# Altium PCB F103RCT6验证板_2022-02-19.pcbdoc (part 1 of 2)
Units mm, origin at the board's own origin, x right, y up, seen from the top; angles counter-clockwise.
Board outline 119 x 89.53 mm, 2 copper layers (Top Layer, Bottom Layer); 128 components, 123 nets, 496 pads, 479 vias.
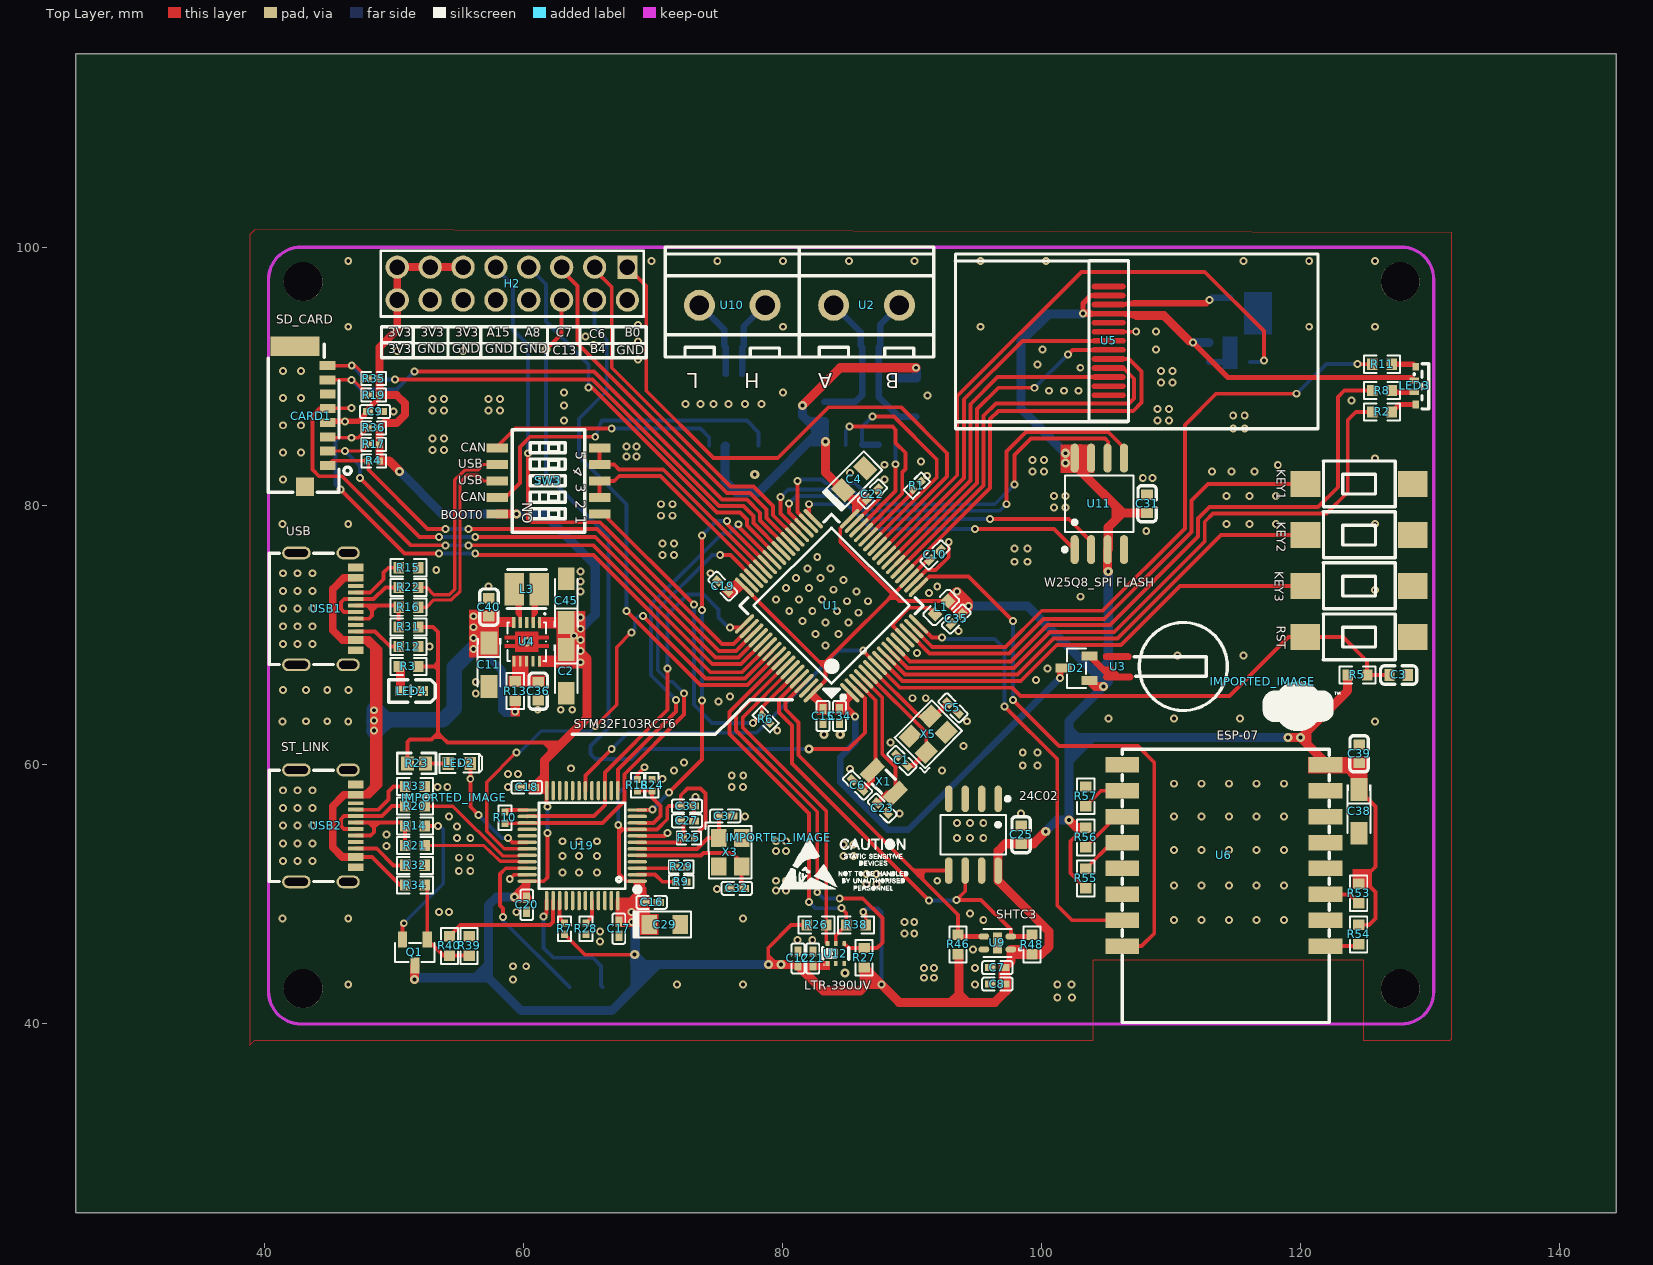
[diagram p0: Top Layer view]
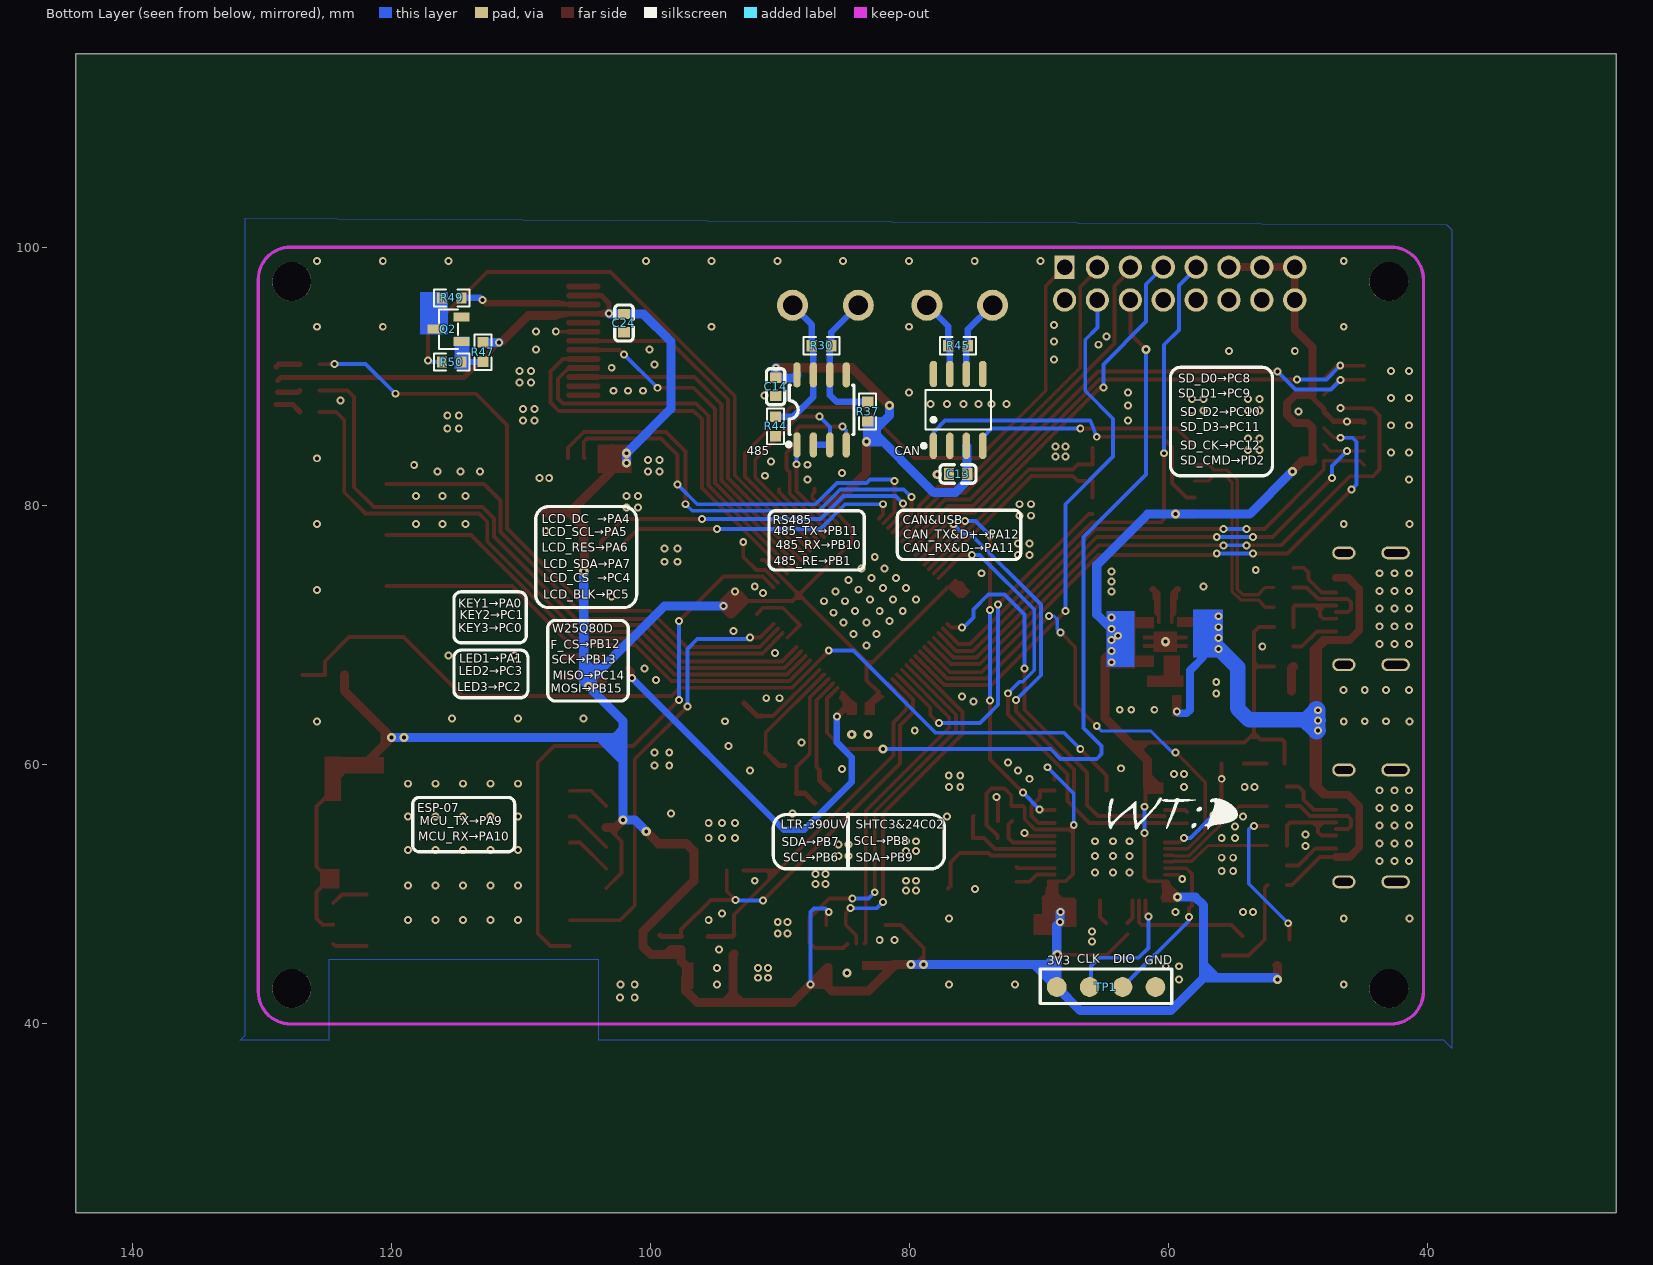
[diagram p1: Bottom Layer view, seen from below]

## Layer stack, top to bottom
Top Layer: signal copper (thickness not stored)
Dielectric: dielectric 0.32, FR-4, Dk 4.8
Bottom Layer: signal copper (thickness not stored)

## Board outline
144.399,25.4 25.4,25.4 25.4,114.935 144.399,114.935

## Components (designator, comment, footprint, x,y, rotation, side; value= is the part's Value field where it differs from the comment)
24C02 "M24C02-WMN6TP" SOIC-8_L4.9-W3.9-P1.27-LS6.0-BL#1 94.743,54.609 r180 top
485 "SP3485EN-L/TR" SOIC-8_L5.0-W4.0-P1.27-LS6.0-BL 86.782,87.422 r0 bottom
C1 "10pF" C0402 89.224,60.343 r315 top
C2 "10uF" CAP-SMD_L3.2-W1.6-R-RD 63.287,67.229 r90 top
C3 "100nF" C0603#1 127.578,66.947 r180 top
C4 "TCA1C106M8R" CAP-SMD_L3.2-W1.6-FD 85.541,82.06 r45 top
C5 "10pF" C0402 93.161,64.407 r135 top
C6 "10pF" C0402 85.795,58.438 r135 top
C7 "100nF" C0402_NEW 96.59,44.341 r0 top
C8 "10uF" C0402 96.59,43.071 r0 top
C9 "100nF" C0402_NEW 48.525,87.295 r180 top
C10 "100nF" C0402_NEW 91.764,76.218 r225 top
C11 "10uF" CAP-SMD_L3.2-W1.6-R-RD 57.318,67.737 r90 top
C12 "100nF" C0402_NEW 81.191,45.047 r270 top
C13 "100nF" C0603#2 76.241,82.469 r0 bottom
C14 "100nF" C0603#2 90.338,89.2 r90 bottom
C15 "100nF" C0402_NEW 83.128,63.772 r90 top
C16 "100nF" C0402_NEW 69.891,49.384 r180 top
C17 "100nF" C0402_NEW 67.351,47.352 r90 top
C18 "100nF" C0402_NEW 60.239,58.274 r0 top
C19 "100nF" C0402_NEW 75.381,73.805 r315 top
C20 "100nF" C0402_NEW 60.239,49.195 r90 top
C21 "4.7uF" C0402 82.334,45.047 r270 top
C22 "100nF" C0402_NEW 86.938,80.917 r225 top
C23 "10pF" C0402 87.7,56.66 r315 top
C24 "1uF" C0603#2 102.051,94.125 r90 bottom
C25 "100nF" C0603#1 98.426,54.609 r90 top
C27 "100nF" C0402_NEW 72.613,55.677 r180 top
C29 "TCA1C106M8R" CAP-SMD_L3.2-W1.6-FD 70.907,47.671 r0 top
C31 "100nF" C0603#1 108.151,80.162 r270 top
C32 "15pF" C0402 76.465,50.465 r0 top
C33 "100nF" C0402_NEW 72.613,56.82 r180 top
C34 "100nF" C0402_NEW 84.398,63.772 r270 top
C35 "100nF" C0402_NEW 93.418,71.271 r45 top
C36 "100nF" C0603#1 61.128,65.705 r90 top
C37 "15pF" C0402 75.576,56.053 r180 top
C38 "10uF" CAP-SMD_L3.2-W1.6-R-RD 124.53,56.406 r90 top
C39 "100nF" C0603#1 124.53,60.851 r270 top
C40 "100nF" C0603#1 57.318,72.182 r270 top
C45 "10uF" CAP-SMD_L3.2-W1.6-R-RD 63.287,72.69 r270 top
CAN "SN65HVD230DR" SOIC-8_L4.9-W3.9-P1.27-LS6.0-BL#2 76.241,87.422 r0 bottom
CARD1 "TF-021B-H265" TF-SMD_TF-021B-H265 43.602,86.914 r270 top
D2 "BAT54C_C501651" SOT-23-3_L2.9-W1.3-P1.90-LS2.4-BR#1 102.702,67.474 r0 top
H2 "PZ254V-12-16P" HDR-TH_16P-P2.54-V-M-R2-C8-S2.54 59.129,97.18 r180 top
IMPORTED_IMAGE "IMPORTED_IMAGE" IMPORTED_IMAGE 79.716,54.371 r0 top
IMPORTED_IMAGE "IMPORTED_IMAGE" IMPORTED_IMAGE 117.095,66.441 r0 top
IMPORTED_IMAGE "IMPORTED_IMAGE" IMPORTED_IMAGE 54.652,57.47 r0 top
KEY1 "1TS002B-2500-4300" SW-SMD_L3.5-W6.0-P8.20 124.534,81.686 r0 top
KEY2 "1TS002B-2500-4300" SW-SMD_L3.5-W6.0-P8.20 124.534,77.749 r0 top
KEY3 "1TS002B-2500-4300" SW-SMD_L3.5-W6.0-P8.20 124.534,73.812 r0 top
L1 "600Ω" L0603 92.275,72.16 r45 top
L3 "2.2uH" IND-SMD_L2.5-W2.0_SPH252012 60.239,73.579 r0 top
LED2 "LED-0603_R" LED0603_RED 55.032,60.117 r0 top
LED3 "FM-3510RGBA-SG" LED-SMD_FM-3510RGBA-SG 128.848,89.299 r270 top
LED4 "KT-0603R" LED0603-R-RD 51.349,65.705 r180 top
Q1 "SS8050_C2150" SOT-23-3_L2.9-W1.3-P1.90-LS2.4-BR#1 51.603,45.512 r90 top
Q2 "SS8050_C2150" SOT-23-3_L2.9-W1.3-P1.90-LS2.4-BR#2 115.605,93.655 r0 bottom
R1 "10K" R0402 90.383,81.571 r45 top
R2 "1K" R0603#1 126.308,87.267 r180 top
R3 "1K" R0603#1 51.095,67.61 r0 top
R4 "10K" R0402 48.428,83.485 r0 top
R5 "10K" R0603#1 124.403,66.947 r0 top
R6 "10K" R0402 78.699,63.537 r315 top
R7 "4.7K" R0402 63.16,47.352 r90 top
R8 "1K" R0603#1 126.308,88.918 r180 top
R9 "10K" R0402 72.177,50.973 r0 top
R10 "100" R0402 58.558,55.926 r270 top
R11 "1K" R0603#1 126.308,90.95 r180 top
R12 "5.1K" R0603#1 51.095,69.134 r0 top
R13 "100" R0603#1 59.35,65.705 r270 top
R14 "1.5K" R0603#1 51.603,55.291 r180 top
R15 "5.1K" R0603#1 51.095,75.23 r0 top
R16 "22" R0603#1 51.095,72.182 r0 top
R17 "10K" R0402 48.428,84.755 r0 top
R18 "4.7K" R0402 68.781,58.445 r270 top
R19 "10K" R0402 48.428,88.565 r180 top
R20 "22" R0603#1 51.603,56.815 r0 top
R21 "22" R0603#1 51.603,53.767 r0 top
R22 "22" R0603#1 51.095,73.706 r0 top
R23 "1k" 0603 51.73,60.117 r0 top
R24 "4.7K" R0402 69.924,58.445 r90 top
R25 "100K" R0402 72.771,54.356 r0 top
R26 "4.7K" R0603#1 82.62,47.643 r180 top
R27 "4.7K" R0603#1 86.303,45.103 r90 top
R28 "10K" R0402 64.811,47.352 r90 top
R29 "10K" R0402 72.177,52.116 r0 top
R30 "120" R0603#2 86.782,92.375 r0 bottom
R31 "1.5K" R0603#1 51.095,70.658 r0 top
R32 "5.1K" R0603#1 51.603,52.243 r0 top
R33 "5.1K" R0603#1 51.603,58.339 r0 top
R34 "10K" R0603#1 51.603,50.719 r180 top
R35 "10K" R0402 48.428,89.835 r180 top
R36 "10K" R0402 48.428,86.025 r0 top
R37 "360" R0603#2 83.226,87.295 r90 bottom
R38 "4.7K" R0603#1 85.668,47.643 r0 top
R39 "36K" R0603#1 55.794,46.02 r270 top
R40 "100" R0603#1 54.27,46.02 r90 top
R44 "360" R0603#2 90.338,86.152 r90 bottom
R45 "120" R0603#2 76.241,92.375 r180 bottom
R46 "4.7K" R0603#1 93.558,46.138 r90 top
R47 "10K" R0603#2 112.938,91.877 r270 bottom
R48 "4.7K" R0603#1 99.258,46.119 r90 top
R49 "10Ω" R0603#2 115.351,96.068 r0 bottom
R50 "1K" R0603#2 115.351,91.115 r0 bottom
R53 "10K" R0603#1 124.501,50.084 r270 top
R54 "10K" R0603#1 124.501,46.909 r270 top
R55 "10K" R0603#1 103.419,51.227 r270 top
R56 "10K" R0603#1 103.419,54.402 r90 top
R57 "10K" R0603#1 103.419,57.577 r90 top
RST "1TS002B-2500-4300" SW-SMD_L3.5-W6.0-P8.20 124.53,69.868 r0 top
SW3 "TP-05" SW-SMD_TP-05 61.919,81.933 r90 top
TP1 "TP-SWD-2.54-4P" TP-2.54-4P 68.621,42.845 r0 bottom
U1 "STM32F103RCT6" LQFP-64_L10.0-W10.0-P0.50-LS12.0-BL 83.779,72.3 r45 top
U2 "DB127V-5.0-2P-BK-S" CONN-TH_2P-P5.00_DB127V-5.0-2P-BK-S 86.487,95.504 r180 top
U3 "RTC_BAT" RTC_BAT 110.957,67.601 r180 top
U4 "TPS63001DRCR" VSON-10_L3.0-W3.0-P0.50-TL-EP_TPS62410DRCR 60.239,69.515 r270 top
U5 "LCD0.96" LCD0.96 105.191,96.957 r270 top
U6 "ESP-07" WIFIM-SMD_ESP-07 114.087,53.005 r90 top
U9 "SHTC3" SENSORM-SMD_4P-L2.0-W2.0-P1.00 96.59,46.246 r90 top
U10 "DB127V-5.0-2P-BK-S" CONN-TH_2P-P5.00_DB127V-5.0-2P-BK-S 76.114,95.504 r180 top
U11 "W25Q80DVSSIG" SOIC-8_L5.3-W5.3-P1.27-LS8.0-BL 104.468,80.162 r0 top
U12 "LTR-390UV-01" SENSOR-SMD_LTR-390UV-01 84.112,45.428 r0 top
U19 "STM32F103CBT6" LQFP-48_L7.0-W7.0-P0.50-LS9.0-BL 64.527,53.767 r90 top
USB1 "GT-USB-7010B" USB-C-SMD_GT-USB-7010B 44.744,72.056 r270 top
USB2 "GT-USB-7010B" USB-C-SMD_GT-USB-7010B 44.744,55.292 r270 top
X1 "32.768KHz" FC-135R_L3.2-W1.5 87.827,58.692 r135 top
X3 "8MHz" OSC-SMD_4P-L3.2-W2.5-BL 75.957,53.259 r270 top
X5 "16MHz" OSC-SMD_4P-L3.2-W2.5-BL 91.256,62.375 r45 top

## Footprints (in the part's own frame and the unit in brackets; to place one, negate y for a bottom-side part, rotate by r counter-clockwise, add the part's x,y. Pads: shape width x height; smd on the part's side, far side on the other; paste and mask are expansions set on the pad)
0603 [mm]
  rect 1x1.1 smd: 1(-0.7,0) 2(0.7,0)
  silkscreen extent -1.5,-0.8 1.5,0.8
C0402 [mm]
  rect 0.79x0.54 smd: 1(-0.545,0) 2(0.545,0)
  silkscreen extent -1.17,-0.5 1.17,0.5
C0402_NEW [mm]
  rect 0.79x0.54 smd: 1(-0.545,0) 2(0.545,0)
  silkscreen extent -1.17,-0.5 1.17,0.5
C0603#1 [mm]
  rect 0.8x0.9 smd: 1(-0.7,0) 2(0.7,0)
  silkscreen extent -1.41,-0.71 1.39,0.72
C0603#2 [mm]
  rect 0.8x0.9 smd: 1(0.7,0) 2(-0.7,0)
  silkscreen extent -1.39,-0.72 1.41,0.71
CAP-SMD_L3.2-W1.6-FD [mm]
  rect 1.2x1.5 smd: 1(-1.2,0) 2(1.2,0)
  silkscreen extent -2.41,-1.02 2.03,1.02
CAP-SMD_L3.2-W1.6-R-RD [mm]
  rect 1.758x1.296 smd: 1(1.686,0) 2(-1.686,0)
  silkscreen extent -1.68,-0.95 2.06,0.95
CONN-TH_2P-P5.00_DB127V-5.0-2P-BK-S [mm]
  round 2.4 hole 1.5: 1(-2.54,0) 2(2.54,0)
  silkscreen extent -5.18,-4.5 5.18,4
FC-135R_L3.2-W1.5 [mm]
  rect 1x1.8 smd: 1(-1.25,0) 2(1.25,0)
  silkscreen extent -0.51,-0.76 0.51,0.76
HDR-TH_16P-P2.54-V-M-R2-C8-S2.54 [mm]
  rect 1.575x1.8 hole 1.2: 1(-8.89,-1.27)
  round 1.8 hole 1.2: 2(-8.89,1.27) 3(-6.35,-1.27) 4(-6.35,1.27) 5(-3.81,-1.27) 6(-3.81,1.27) 7(-1.27,-1.27) 8(-1.27,1.27) 9(1.27,-1.27) 10(1.27,1.27) 11(3.81,-1.27) 12(3.81,1.27) 13(6.35,-1.27) 14(6.35,1.27) 15(8.89,-1.27) 16(8.89,1.27)
  silkscreen extent -10.16,-2.54 10.16,2.54
IMPORTED_IMAGE [mm]
  silkscreen extent 0,-4.09 9.99,0
IND-SMD_L2.5-W2.0_SPH252012 [mm]
  rect 1.5x2.5 smd: 1(-0.968,0) 2(0.969,0)
  silkscreen extent -1.53,-1.49 1.51,1.51
L0603 [mm]
  rect 0.8x0.864 smd: 1(0.7,0) 2(-0.7,0)
  silkscreen extent -1.42,-0.65 1.41,0.67
LCD0.96 [mm]
  round 0 smd: 1(8.4,0) 2(7.7,0) 3(7,0) 4(6.3,0) 5(5.6,0) 6(4.9,0) 7(4.2,0) 8(3.5,0) 9(2.8,0) 10(2.1,0) 11(1.4,0) 12(0.7,0) 13(0,0)
  Top Layer region: 0.2,1.1 0.2,-1.1 0.199,-1.12 0.196,-1.14 0.191,-1.16 0.184,-1.179 0.175,-1.197 0.164,-1.214 0.152,-1.23 0.138,-1.245 0.122,-1.258 0.106,-1.27 0.088,-1.28 0.069,-1.288 0.05,-1.294 0.03,-1.298 0.01,-1.3 -0.01,-1.3 -0.03,-1.298 -0.05,-1.294 -0.069,-1.288 -0.088,-1.28 -0.106,-1.27 -0.122,-1.258 -0.138,-1.245 -0.152,-1.23 -0.164,-1.214 -0.175,-1.197 -0.184,-1.179 -0.191,-1.16 -0.196,-1.14 -0.199,-1.12 -0.2,-1.1 -0.2,1.1 -0.199,1.12 -0.196,1.14 -0.191,1.16 -0.184,1.179 -0.175,1.197 -0.164,1.214 -0.152,1.23 -0.138,1.245 -0.122,1.258 -0.106,1.27 -0.088,1.28 -0.069,1.288 -0.05,1.294 -0.03,1.298 -0.01,1.3 0.01,1.3 0.03,1.298 0.05,1.294 0.069,1.288 0.088,1.28 0.106,1.27 0.122,1.258 0.138,1.245 0.152,1.23 0.164,1.214 0.175,1.197 0.184,1.179 0.191,1.16 0.196,1.14 0.199,1.12
  Top Layer region: 0.9,1.1 0.9,-1.1 0.899,-1.12 0.896,-1.14 0.891,-1.16 0.884,-1.179 0.875,-1.197 0.864,-1.214 0.852,-1.23 0.838,-1.245 0.822,-1.258 0.806,-1.27 0.788,-1.28 0.769,-1.288 0.75,-1.294 0.73,-1.298 0.71,-1.3 0.69,-1.3 0.67,-1.298 0.65,-1.294 0.631,-1.288 0.612,-1.28 0.594,-1.27 0.578,-1.258 0.562,-1.245 0.548,-1.23 0.536,-1.214 0.525,-1.197 0.516,-1.179 0.509,-1.16 0.504,-1.14 0.501,-1.12 0.5,-1.1 0.5,1.1 0.501,1.12 0.504,1.14 0.509,1.16 0.516,1.179 0.525,1.197 0.536,1.214 0.548,1.23 0.562,1.245 0.578,1.258 0.594,1.27 0.612,1.28 0.631,1.288 0.65,1.294 0.67,1.298 0.69,1.3 0.71,1.3 0.73,1.298 0.75,1.294 0.769,1.288 0.788,1.28 0.806,1.27 0.822,1.258 0.838,1.245 0.852,1.23 0.864,1.214 0.875,1.197 0.884,1.179 0.891,1.16 0.896,1.14 0.899,1.12
  Top Layer region: 1.6,1.1 1.6,-1.1 1.599,-1.12 1.596,-1.14 1.591,-1.16 1.584,-1.179 1.575,-1.197 1.564,-1.214 1.552,-1.23 1.538,-1.245 1.522,-1.258 1.506,-1.27 1.488,-1.28 1.469,-1.288 1.45,-1.294 1.43,-1.298 1.41,-1.3 1.39,-1.3 1.37,-1.298 1.35,-1.294 1.331,-1.288 1.312,-1.28 1.294,-1.27 1.278,-1.258 1.262,-1.245 1.248,-1.23 1.236,-1.214 1.225,-1.197 1.216,-1.179 1.209,-1.16 1.204,-1.14 1.201,-1.12 1.2,-1.1 1.2,1.1 1.201,1.12 1.204,1.14 1.209,1.16 1.216,1.179 1.225,1.197 1.236,1.214 1.248,1.23 1.262,1.245 1.278,1.258 1.294,1.27 1.312,1.28 1.331,1.288 1.35,1.294 1.37,1.298 1.39,1.3 1.41,1.3 1.43,1.298 1.45,1.294 1.469,1.288 1.488,1.28 1.506,1.27 1.522,1.258 1.538,1.245 1.552,1.23 1.564,1.214 1.575,1.197 1.584,1.179 1.591,1.16 1.596,1.14 1.599,1.12
  Top Layer region: 2.3,1.1 2.3,-1.1 2.299,-1.12 2.296,-1.14 2.291,-1.16 2.284,-1.179 2.275,-1.197 2.264,-1.214 2.252,-1.23 2.238,-1.245 2.222,-1.258 2.206,-1.27 2.188,-1.28 2.169,-1.288 2.15,-1.294 2.13,-1.298 2.11,-1.3 2.09,-1.3 2.07,-1.298 2.05,-1.294 2.031,-1.288 2.012,-1.28 1.994,-1.27 1.978,-1.258 1.962,-1.245 1.948,-1.23 1.936,-1.214 1.925,-1.197 1.916,-1.179 1.909,-1.16 1.904,-1.14 1.901,-1.12 1.9,-1.1 1.9,1.1 1.901,1.12 1.904,1.14 1.909,1.16 1.916,1.179 1.925,1.197 1.936,1.214 1.948,1.23 1.962,1.245 1.978,1.258 1.994,1.27 2.012,1.28 2.031,1.288 2.05,1.294 2.07,1.298 2.09,1.3 2.11,1.3 2.13,1.298 2.15,1.294 2.169,1.288 2.188,1.28 2.206,1.27 2.222,1.258 2.238,1.245 2.252,1.23 2.264,1.214 2.275,1.197 2.284,1.179 2.291,1.16 2.296,1.14 2.299,1.12
  Top Layer region: 3,1.1 3,-1.1 2.999,-1.12 2.996,-1.14 2.991,-1.16 2.984,-1.179 2.975,-1.197 2.964,-1.214 2.952,-1.23 2.938,-1.245 2.922,-1.258 2.906,-1.27 2.888,-1.28 2.869,-1.288 2.85,-1.294 2.83,-1.298 2.81,-1.3 2.79,-1.3 2.77,-1.298 2.75,-1.294 2.731,-1.288 2.712,-1.28 2.694,-1.27 2.678,-1.258 2.662,-1.245 2.648,-1.23 2.636,-1.214 2.625,-1.197 2.616,-1.179 2.609,-1.16 2.604,-1.14 2.601,-1.12 2.6,-1.1 2.6,1.1 2.601,1.12 2.604,1.14 2.609,1.16 2.616,1.179 2.625,1.197 2.636,1.214 2.648,1.23 2.662,1.245 2.678,1.258 2.694,1.27 2.712,1.28 2.731,1.288 2.75,1.294 2.77,1.298 2.79,1.3 2.81,1.3 2.83,1.298 2.85,1.294 2.869,1.288 2.888,1.28 2.906,1.27 2.922,1.258 2.938,1.245 2.952,1.23 2.964,1.214 2.975,1.197 2.984,1.179 2.991,1.16 2.996,1.14 2.999,1.12
  Top Layer region: 3.7,1.1 3.7,-1.1 3.699,-1.12 3.696,-1.14 3.691,-1.16 3.684,-1.179 3.675,-1.197 3.664,-1.214 3.652,-1.23 3.638,-1.245 3.622,-1.258 3.606,-1.27 3.588,-1.28 3.569,-1.288 3.55,-1.294 3.53,-1.298 3.51,-1.3 3.49,-1.3 3.47,-1.298 3.45,-1.294 3.431,-1.288 3.412,-1.28 3.394,-1.27 3.378,-1.258 3.362,-1.245 3.348,-1.23 3.336,-1.214 3.325,-1.197 3.316,-1.179 3.309,-1.16 3.304,-1.14 3.301,-1.12 3.3,-1.1 3.3,1.1 3.301,1.12 3.304,1.14 3.309,1.16 3.316,1.179 3.325,1.197 3.336,1.214 3.348,1.23 3.362,1.245 3.378,1.258 3.394,1.27 3.412,1.28 3.431,1.288 3.45,1.294 3.47,1.298 3.49,1.3 3.51,1.3 3.53,1.298 3.55,1.294 3.569,1.288 3.588,1.28 3.606,1.27 3.622,1.258 3.638,1.245 3.652,1.23 3.664,1.214 3.675,1.197 3.684,1.179 3.691,1.16 3.696,1.14 3.699,1.12
  Top Layer region: 4.4,1.1 4.4,-1.1 4.399,-1.12 4.396,-1.14 4.391,-1.16 4.384,-1.179 4.375,-1.197 4.364,-1.214 4.352,-1.23 4.338,-1.245 4.322,-1.258 4.306,-1.27 4.288,-1.28 4.269,-1.288 4.25,-1.294 4.23,-1.298 4.21,-1.3 4.19,-1.3 4.17,-1.298 4.15,-1.294 4.131,-1.288 4.112,-1.28 4.094,-1.27 4.078,-1.258 4.062,-1.245 4.048,-1.23 4.036,-1.214 4.025,-1.197 4.016,-1.179 4.009,-1.16 4.004,-1.14 4.001,-1.12 4,-1.1 4,1.1 4.001,1.12 4.004,1.14 4.009,1.16 4.016,1.179 4.025,1.197 4.036,1.214 4.048,1.23 4.062,1.245 4.078,1.258 4.094,1.27 4.112,1.28 4.131,1.288 4.15,1.294 4.17,1.298 4.19,1.3 4.21,1.3 4.23,1.298 4.25,1.294 4.269,1.288 4.288,1.28 4.306,1.27 4.322,1.258 4.338,1.245 4.352,1.23 4.364,1.214 4.375,1.197 4.384,1.179 4.391,1.16 4.396,1.14 4.399,1.12
  Top Layer region: 5.1,1.1 5.1,-1.1 5.099,-1.12 5.096,-1.14 5.091,-1.16 5.084,-1.179 5.075,-1.197 5.064,-1.214 5.052,-1.23 5.038,-1.245 5.022,-1.258 5.006,-1.27 4.988,-1.28 4.969,-1.288 4.95,-1.294 4.93,-1.298 4.91,-1.3 4.89,-1.3 4.87,-1.298 4.85,-1.294 4.831,-1.288 4.812,-1.28 4.794,-1.27 4.778,-1.258 4.762,-1.245 4.748,-1.23 4.736,-1.214 4.725,-1.197 4.716,-1.179 4.709,-1.16 4.704,-1.14 4.701,-1.12 4.7,-1.1 4.7,1.1 4.701,1.12 4.704,1.14 4.709,1.16 4.716,1.179 4.725,1.197 4.736,1.214 4.748,1.23 4.762,1.245 4.778,1.258 4.794,1.27 4.812,1.28 4.831,1.288 4.85,1.294 4.87,1.298 4.89,1.3 4.91,1.3 4.93,1.298 4.95,1.294 4.969,1.288 4.988,1.28 5.006,1.27 5.022,1.258 5.038,1.245 5.052,1.23 5.064,1.214 5.075,1.197 5.084,1.179 5.091,1.16 5.096,1.14 5.099,1.12
  Top Layer region: 5.8,1.1 5.8,-1.1 5.799,-1.12 5.796,-1.14 5.791,-1.16 5.784,-1.179 5.775,-1.197 5.764,-1.214 5.752,-1.23 5.738,-1.245 5.722,-1.258 5.706,-1.27 5.688,-1.28 5.669,-1.288 5.65,-1.294 5.63,-1.298 5.61,-1.3 5.59,-1.3 5.57,-1.298 5.55,-1.294 5.531,-1.288 5.512,-1.28 5.494,-1.27 5.478,-1.258 5.462,-1.245 5.448,-1.23 5.436,-1.214 5.425,-1.197 5.416,-1.179 5.409,-1.16 5.404,-1.14 5.401,-1.12 5.4,-1.1 5.4,1.1 5.401,1.12 5.404,1.14 5.409,1.16 5.416,1.179 5.425,1.197 5.436,1.214 5.448,1.23 5.462,1.245 5.478,1.258 5.494,1.27 5.512,1.28 5.531,1.288 5.55,1.294 5.57,1.298 5.59,1.3 5.61,1.3 5.63,1.298 5.65,1.294 5.669,1.288 5.688,1.28 5.706,1.27 5.722,1.258 5.738,1.245 5.752,1.23 5.764,1.214 5.775,1.197 5.784,1.179 5.791,1.16 5.796,1.14 5.799,1.12
  Top Layer region: 6.5,1.1 6.5,-1.1 6.499,-1.12 6.496,-1.14 6.491,-1.16 6.484,-1.179 6.475,-1.197 6.464,-1.214 6.452,-1.23 6.438,-1.245 6.422,-1.258 6.406,-1.27 6.388,-1.28 6.369,-1.288 6.35,-1.294 6.33,-1.298 6.31,-1.3 6.29,-1.3 6.27,-1.298 6.25,-1.294 6.231,-1.288 6.212,-1.28 6.194,-1.27 6.178,-1.258 6.162,-1.245 6.148,-1.23 6.136,-1.214 6.125,-1.197 6.116,-1.179 6.109,-1.16 6.104,-1.14 6.101,-1.12 6.1,-1.1 6.1,1.1 6.101,1.12 6.104,1.14 6.109,1.16 6.116,1.179 6.125,1.197 6.136,1.214 6.148,1.23 6.162,1.245 6.178,1.258 6.194,1.27 6.212,1.28 6.231,1.288 6.25,1.294 6.27,1.298 6.29,1.3 6.31,1.3 6.33,1.298 6.35,1.294 6.369,1.288 6.388,1.28 6.406,1.27 6.422,1.258 6.438,1.245 6.452,1.23 6.464,1.214 6.475,1.197 6.484,1.179 6.491,1.16 6.496,1.14 6.499,1.12
  Top Layer region: 8.6,1.1 8.6,-1.1 8.599,-1.12 8.596,-1.14 8.591,-1.16 8.584,-1.179 8.575,-1.197 8.564,-1.214 8.552,-1.23 8.538,-1.245 8.522,-1.258 8.506,-1.27 8.488,-1.28 8.469,-1.288 8.45,-1.294 8.43,-1.298 8.41,-1.3 8.39,-1.3 8.37,-1.298 8.35,-1.294 8.331,-1.288 8.312,-1.28 8.294,-1.27 8.278,-1.258 8.262,-1.245 8.248,-1.23 8.236,-1.214 8.225,-1.197 8.216,-1.179 8.209,-1.16 8.204,-1.14 8.201,-1.12 8.2,-1.1 8.2,1.1 8.201,1.12 8.204,1.14 8.209,1.16 8.216,1.179 8.225,1.197 8.236,1.214 8.248,1.23 8.262,1.245 8.278,1.258 8.294,1.27 8.312,1.28 8.331,1.288 8.35,1.294 8.37,1.298 8.39,1.3 8.41,1.3 8.43,1.298 8.45,1.294 8.469,1.288 8.488,1.28 8.506,1.27 8.522,1.258 8.538,1.245 8.552,1.23 8.564,1.214 8.575,1.197 8.584,1.179 8.591,1.16 8.596,1.14 8.599,1.12
  Top Layer region: 7.9,1.1 7.9,-1.1 7.899,-1.12 7.896,-1.14 7.891,-1.16 7.884,-1.179 7.875,-1.197 7.864,-1.214 7.852,-1.23 7.838,-1.245 7.822,-1.258 7.806,-1.27 7.788,-1.28 7.769,-1.288 7.75,-1.294 7.73,-1.298 7.71,-1.3 7.69,-1.3 7.67,-1.298 7.65,-1.294 7.631,-1.288 7.612,-1.28 7.594,-1.27 7.578,-1.258 7.562,-1.245 7.548,-1.23 7.536,-1.214 7.525,-1.197 7.516,-1.179 7.509,-1.16 7.504,-1.14 7.501,-1.12 7.5,-1.1 7.5,1.1 7.501,1.12 7.504,1.14 7.509,1.16 7.516,1.179 7.525,1.197 7.536,1.214 7.548,1.23 7.562,1.245 7.578,1.258 7.594,1.27 7.612,1.28 7.631,1.288 7.65,1.294 7.67,1.298 7.69,1.3 7.71,1.3 7.73,1.298 7.75,1.294 7.769,1.288 7.788,1.28 7.806,1.27 7.822,1.258 7.838,1.245 7.852,1.23 7.864,1.214 7.875,1.197 7.884,1.179 7.891,1.16 7.896,1.14 7.899,1.12
  Top Layer region: 7.2,1.1 7.2,-1.1 7.199,-1.12 7.196,-1.14 7.191,-1.16 7.184,-1.179 7.175,-1.197 7.164,-1.214 7.152,-1.23 7.138,-1.245 7.122,-1.258 7.106,-1.27 7.088,-1.28 7.069,-1.288 7.05,-1.294 7.03,-1.298 7.01,-1.3 6.99,-1.3 6.97,-1.298 6.95,-1.294 6.931,-1.288 6.912,-1.28 6.894,-1.27 6.878,-1.258 6.862,-1.245 6.848,-1.23 6.836,-1.214 6.825,-1.197 6.816,-1.179 6.809,-1.16 6.804,-1.14 6.801,-1.12 6.8,-1.1 6.8,1.1 6.801,1.12 6.804,1.14 6.809,1.16 6.816,1.179 6.825,1.197 6.836,1.214 6.848,1.23 6.862,1.245 6.878,1.258 6.894,1.27 6.912,1.28 6.931,1.288 6.95,1.294 6.97,1.298 6.99,1.3 7.01,1.3 7.03,1.298 7.05,1.294 7.069,1.288 7.088,1.28 7.106,1.27 7.122,1.258 7.138,1.245 7.152,1.23 7.164,1.214 7.175,1.197 7.184,1.179 7.191,1.16 7.196,1.14 7.199,1.12
  silkscreen extent -2,-1.52 10.41,1.52
LED0603-R-RD [mm]
  rect 0.8x0.8 smd: 1(0.851,0) 2(-0.851,0)
  silkscreen extent -1.82,-0.86 1.77,0.86
LED0603_RED [mm]
  rect 0.9x1 smd: 1(-0.85,0) 2(0.85,0)
  silkscreen extent -1.54,-0.73 1.75,0.73
LED-SMD_FM-3510RGBA-SG [mm]
  rect 0.6x0.5 smd: 1(-1.46,0.062) 4(1.46,0.062)
  rect 0.44x0.75 smd: 2(-0.39,-0.062) 3(0.51,-0.062)
  silkscreen extent -1.69,-0.06 1.81,1.06
LQFP-48_L7.0-W7.0-P0.50-LS9.0-BL [mm]
  oval 0.27x1.5 smd: 1(-2.75,-4.25) 2(-2.25,-4.25) 3(-1.75,-4.25) 4(-1.25,-4.25) 5(-0.75,-4.25) 6(-0.25,-4.25) 7(0.25,-4.25) 8(0.75,-4.25) 9(1.25,-4.25) 10(1.75,-4.25) 11(2.25,-4.25) 12(2.75,-4.25) 25(2.75,4.25) 26(2.25,4.25) 27(1.75,4.25) 28(1.25,4.25) 29(0.75,4.25) 30(0.25,4.25) 31(-0.25,4.25) 32(-0.75,4.25) 33(-1.25,4.25) 34(-1.75,4.25) 35(-2.25,4.25) 36(-2.75,4.25)
  oval 1.5x0.27 smd: 13(4.25,-2.75) 14(4.25,-2.25) 15(4.25,-1.75) 16(4.25,-1.25) 17(4.25,-0.75) 18(4.25,-0.25) 19(4.25,0.25) 20(4.25,0.75) 21(4.25,1.25) 22(4.25,1.75) 23(4.25,2.25) 24(4.25,2.75) 37(-4.25,2.75) 38(-4.25,2.25) 39(-4.25,1.75) 40(-4.25,1.25) 41(-4.25,0.75) 42(-4.25,0.25) 43(-4.25,-0.25) 44(-4.25,-0.75) 45(-4.25,-1.25) 46(-4.25,-1.75) 47(-4.25,-2.25) 48(-4.25,-2.75)
  silkscreen extent -3.59,-4.46 3.3,3.34
LQFP-64_L10.0-W10.0-P0.50-LS12.0-BL [mm]
  oval 0.3x2 smd: 1(-3.75,-5.75) 2(-3.25,-5.75) 3(-2.75,-5.75) 4(-2.25,-5.75) 5(-1.75,-5.75) 6(-1.25,-5.75) 7(-0.75,-5.75) 8(-0.25,-5.75) 9(0.25,-5.75) 10(0.75,-5.75) 11(1.25,-5.75) 12(1.75,-5.75) 13(2.25,-5.75) 14(2.75,-5.75) 15(3.25,-5.75) 16(3.75,-5.75) 33(3.75,5.75) 34(3.25,5.75) 35(2.75,5.75) 36(2.25,5.75) 37(1.75,5.75) 38(1.25,5.75) 39(0.75,5.75) 40(0.25,5.75) 41(-0.25,5.75) 42(-0.75,5.75) 43(-1.25,5.75) 44(-1.75,5.75) 45(-2.25,5.75) 46(-2.75,5.75) 47(-3.25,5.75) 48(-3.75,5.75)
  oval 2x0.3 smd: 17(5.75,-3.75) 18(5.75,-3.25) 19(5.75,-2.75) 20(5.75,-2.25) 21(5.75,-1.75) 22(5.75,-1.25) 23(5.75,-0.75) 24(5.75,-0.25) 25(5.75,0.25) 26(5.75,0.75) 27(5.75,1.25) 28(5.75,1.75) 29(5.75,2.25) 30(5.75,2.75) 31(5.75,3.25) 32(5.75,3.75) 49(-5.75,3.75) 50(-5.75,3.25) 51(-5.75,2.75) 52(-5.75,2.25) 53(-5.75,1.75) 54(-5.75,1.25) 55(-5.75,0.75) 56(-5.75,0.25) 57(-5.75,-0.25) 58(-5.75,-0.75) 59(-5.75,-1.25) 60(-5.75,-1.75) 61(-5.75,-2.25) 62(-5.75,-2.75) 63(-5.75,-3.25) 64(-5.75,-3.75)
  silkscreen extent -5,-5.79 5,5
OSC-SMD_4P-L3.2-W2.5-BL [mm]
  rect 1.4x1.2 smd: 1(-1.1,-0.875) 2(1.1,-0.875) 3(1.1,0.875) 4(-1.1,0.875)
  silkscreen extent -2.29,-1.9 2.03,1.65
R0402 [mm]
  rect 0.566x0.54 smd: 1(-0.433,0) 2(0.433,0)
  silkscreen extent -0.94,-0.5 0.94,0.5
R0603#1 [mm]
  rect 0.806x0.864 smd: 1(-0.753,0) 2(0.753,0)
  silkscreen extent -1.39,-0.66 1.39,0.66
R0603#2 [mm]
  rect 0.806x0.864 smd: 1(0.753,0) 2(-0.753,0)
  silkscreen extent -1.39,-0.66 1.39,0.66
RTC_BAT [mil]
  round 0 smd: 1(197.99,31.81) 2(201.02,-30)
  Top Layer region: 167.56,-20.16 234.49,-20.16 235.4,-20.2 236.3,-20.32 237.18,-20.53 238.05,-20.82 238.88,-21.19 239.67,-21.63 240.42,-22.15 241.12,-22.73 241.76,-23.37 242.34,-24.07 242.86,-24.82 243.3,-25.61 243.67,-26.44 243.96,-27.31 244.16,-28.19 244.29,-29.09 244.33,-30 244.29,-30.91 244.16,-31.81 243.96,-32.69 243.67,-33.56 243.3,-34.39 242.86,-35.18 242.34,-35.93 241.76,-36.63 241.12,-37.27 240.42,-37.85 239.67,-38.37 238.88,-38.81 238.05,-39.18 237.18,-39.47 236.3,-39.67 235.4,-39.8 234.49,-39.84 167.56,-39.84 166.65,-39.8 165.75,-39.67 164.86,-39.47 164,-39.18 163.17,-38.81 162.38,-38.37 161.63,-37.85 160.93,-37.27 160.28,-36.63 159.7,-35.93 159.19,-35.18 158.75,-34.39 158.38,-33.56 158.09,-32.69 157.88,-31.81 157.76,-30.91 157.72,-30 157.76,-29.09 157.88,-28.19 158.09,-27.31 158.38,-26.44 158.75,-25.61 159.19,-24.82 159.7,-24.07 160.28,-23.37 160.93,-22.73 161.63,-22.15 162.38,-21.63 163.17,-21.19 164,-20.82 164.86,-20.53 165.75,-20.32 166.65,-20.2
  Top Layer region: 162.6,41.64 233.4,41.64 234.31,41.6 235.21,41.48 236.09,41.27 236.96,40.98 237.79,40.61 238.58,40.17 239.33,39.65 240.03,39.07 240.67,38.43 241.25,37.73 241.77,36.98 242.21,36.19 242.58,35.36 242.87,34.49 243.07,33.61 243.2,32.71 243.24,31.8 243.2,30.89 243.07,29.99 242.87,29.11 242.58,28.24 242.21,27.41 241.77,26.62 241.25,25.87 240.67,25.17 240.03,24.53 239.33,23.95 238.58,23.43 237.79,22.99 236.96,22.62 236.09,22.33 235.21,22.13 234.31,22 233.4,21.96 162.6,21.96 161.69,22 160.79,22.13 159.91,22.33 159.04,22.62 158.21,22.99 157.42,23.43 156.67,23.95 155.97,24.53 155.33,25.17 154.75,25.87 154.23,26.62 153.79,27.41 153.42,28.24 153.13,29.11 152.93,29.99 152.8,30.89 152.76,31.8 152.8,32.71 152.93,33.61 153.13,34.49 153.42,35.36 153.79,36.19 154.23,36.98 154.75,37.73 155.33,38.43 155.97,39.07 156.67,39.65 157.42,40.17 158.21,40.61 159.04,40.98 159.91,41.27 160.79,41.48 161.69,41.6
  silkscreen extent -134,-134 150,134
SENSOR-SMD_LTR-390UV-01 [mm]
  rect 0.3x0.4 smd: 1(-0.65,-0.775) 2(0,-0.775) 3(0.65,-0.775) 4(0.65,0.775) 5(0,0.775) 6(-0.65,0.775)
  silkscreen extent -1,-0.9 1,0.46
SENSORM-SMD_4P-L2.0-W2.0-P1.00 [mm]
  oval 0.49x0.83 smd: 1(-0.5,-1.04) 2(0.5,-1.04) 3(0.5,1.04) 4(-0.5,1.04)
  rect 1.6x0.7 smd: 5(0,0)
  silkscreen extent -1.08,-1.84 1.08,1.08
SOIC-8_L4.9-W3.9-P1.27-LS6.0-BL#1 [mm]
  oval 0.588x2.045 smd: 1(-1.905,-2.773) 2(-0.635,-2.773) 3(0.635,-2.773) 4(1.905,-2.773) 5(1.905,2.773) 6(0.635,2.773) 7(-0.635,2.773) 8(-1.905,2.773)
  silkscreen extent -2.8,-2.92 2.53,1.52
SOIC-8_L4.9-W3.9-P1.27-LS6.0-BL#2 [mm]
  oval 0.588x2.045 smd: 1(1.905,2.773) 2(0.635,2.773) 3(-0.635,2.773) 4(-1.905,2.773) 5(-1.905,-2.773) 6(-0.635,-2.773) 7(0.635,-2.773) 8(1.905,-2.773)
  silkscreen extent -2.53,-1.52 2.8,2.92
SOIC-8_L5.0-W4.0-P1.27-LS6.0-BL [mil]
  oval 22.38x76.78 smd: 1(75,106.5) 2(25,106.5) 3(-25,106.5) 4(-75,106.5) 5(-75,-106.5) 6(-25,-106.5) 7(25,-106.5) 8(75,-106.5)
  silkscreen extent -98,-75 106,111
SOIC-8_L5.3-W5.3-P1.27-LS8.0-BL [mm]
  oval 0.63x2.25 smd: 1(-1.905,-3.53) 2(-0.635,-3.53) 3(0.635,-3.53) 4(1.905,-3.53) 5(1.905,3.53) 6(0.635,3.53) 7(-0.635,3.53) 8(-1.905,3.53)
  silkscreen extent -2.82,-3.68 2.64,2.18
SOT-23-3_L2.9-W1.3-P1.90-LS2.4-BR#1 [mm]
  rect 1.25x0.7 smd: 1(1,-0.95) 2(1,0.95) 3(-1,0)
  silkscreen extent -0.73,-1.53 0.73,1.53
SOT-23-3_L2.9-W1.3-P1.90-LS2.4-BR#2 [mm]
  rect 1.25x0.7 smd: 1(-1,0.95) 2(-1,-0.95) 3(1,0)
  silkscreen extent -0.73,-1.53 0.73,1.53
SW-SMD_L3.5-W6.0-P8.20 [mm]
  rect 2.3x2 smd: A(-4.15,0) B(4.15,0)
  silkscreen extent -2.77,-1.75 2.81,1.79
SW-SMD_TP-05 [mm]
  rect 0.7x1.65 smd: 1(-2.54,-3.95) 2(-1.27,-3.95) 3(0,-3.95) 4(1.27,-3.95) 5(2.54,-3.95) 6(2.54,3.95) 7(1.27,3.95) 8(0,3.95) 9(-1.27,3.95) 10(-2.54,3.95)
  silkscreen extent -3.96,-2.8 3.96,2.8
TF-SMD_TF-021B-H265 [mm]
  rect 0.7x1.2 smd: 1(3.775,1.25) 2(2.675,1.25) 3(1.575,1.25) 4(0.475,1.25) 5(-0.625,1.25) 6(-1.725,1.25) 7(-2.825,1.25) 8(-3.925,1.25)
  rect 1.5x3.8 smd: 9(-5.425,-1.25)
  rect 1.45x1.4 smd: 10(5.425,-0.5)
  silkscreen extent -5.58,-3.32 5.85,3.08
TP-2.54-4P [mil]
  round 60 smd: 1(0,0) 2(-100,0) 3(-200,0) 4(-300,0)
  silkscreen extent -350,-55 50,50
USB-C-SMD_GT-USB-7010B [mm]
  rect 0.6x1.2 smd: 1(-3.2,2.3) 2(-2.4,2.3) 11(2.4,2.3) 12(3.2,2.3)
  rect 0.3x1.2 smd: 3(-1.75,2.3) 4(-1.25,2.3) 5(-0.75,2.3) 6(-0.25,2.3) 7(0.25,2.3) 8(0.75,2.3) 9(1.25,2.3) 10(1.75,2.3)
  oval 1x1.8 hole 0.6 slot 1.4 at 90 deg: 13(-4.32,1.7) 14(4.32,1.7)
  oval 1x2.2 hole 0.6 slot 1.8 at 90 deg: 15(-4.32,-2.3) 16(4.32,-2.3)
  silkscreen extent -4.3,-4.4 4.3,0.57
VSON-10_L3.0-W3.0-P0.50-TL-EP_TPS62410DRCR [mm]
  rect 0.85x0.24 smd: 1(-1.5,1) 2(-1.5,0.5) 3(-1.5,0) 4(-1.5,-0.5) 5(-1.5,-1)
  rect 0.8x0.23 smd: 6(1.5,-1) 7(1.5,-0.5) 8(1.5,0) 9(1.5,0.5) 10(1.5,1)
  round 0 smd: 11(0,-0.005)
  Top Layer region: -0.76,0.89 -0.47,0.89 -0.47,1.71 -0.18,1.71 -0.18,0.88 0.18,0.88 0.18,1.71 0.47,1.71 0.47,0.88 0.76,0.88 0.76,-0.89 0.47,-0.89 0.47,-1.71 0.18,-1.71 0.18,-0.89 -0.18,-0.89 -0.18,-1.71 -0.47,-1.71 -0.47,-0.89 -0.76,-0.89 -0.76,0.89 -0.76,0.89 -0.76,0.89
  silkscreen extent -2.21,-1.5 1.52,1.5
WIFIM-SMD_ESP-07 [mm]
  rect 1.2x2.6 smd: 1(-7,-7.848) 2(-5,-7.848) 3(-3,-7.848) 4(-1,-7.848) 5(1,-7.848) 6(3,-7.848) 7(5,-7.848) 8(7,-7.854) 9(7,7.854) 10(5,7.854) 11(3,7.854) 12(1,7.854) 13(-1,7.854) 14(-3,7.854) 15(-5,7.854) 16(-7,7.854)
  silkscreen extent -12.9,-8.15 8.2,7.85

## Free pads (board coordinates)
  round 3 hole 3 unplated: ""(42.967,42.718) ""(42.967,97.328) ""(127.705,42.718) ""(127.705,97.328)

## Via types
v1: diameter 0.61, hole 0.305, Top Layer to Bottom Layer, tented both sides, 454 vias
v2: diameter 0.7, hole 0.305, Top Layer to Bottom Layer, tented both sides, 25 vias

## Nets (pads, with @x,y where several pads share a name; then routed paths per layer and width w, separated by ;. In a path a pad name is that pad's centre, name@x,y a point inside that pad or via, vN(x,y) a via of type N, cw(c..) or ccw(c..) an arc to the next point about the centre after c; other vN are vias at no path point)
3V3: 24C02.8 485.8 C2.1 C4.1 C7.2 C8.2 C9.2 C10.2 C12.2 C13.2 C14.1 C15.2 C16.2 C17.2 C18.2 C19.2 C20.2 C21.2 C22.2 C24.1 C25.1 C29.1 C31.2 C33.2 C35.2 C38.1 C39.2 C45.1 CAN.3 CARD1.4 D2.1 H2.11 H2.13 H2.15 H2.16 L1.1 LED3.2 Q1.3 R3.2 R4.2 R5.1 R7.1 R17.2 R18.1 R19.1 R23.1 R25.2 R26.2 R27.1 R31.2 R35.1 R36.2 R37.2 R38.2 R46.1 R47.2 R48.1 R53.1 R54.1 R55.2 R56.2 SW3.10 TP1.1 U1.19 U1.32 U1.48 U1.64 U4.1 U4.10 U5.10 U5.12 U6.8 U9.1 U11.3 U11.7 U11.8 U12.1 U19.1 U19.9 U19.24 U19.36 U19.48 | length 545.4
  Top Layer w0.254: CARD1.4@44.852,86.439 44.951,86.538 v1@46.198,86.538
  Top Layer w0.3: R23.1@51.03,60.117 51.03,61.765 51.222,61.957 52.873,61.957 53.381,62.465 53.381,68.273 ; R3.2@51.848,67.61 53.127,67.61 ; R31.2@51.848,70.658 53,70.658 53.381,70.277 53.381,67.991 53.127,67.61 ; 53.083,62.167 53.678,62.169 ; 53.381,62.464 53.678,62.169 ; 53.381,67.061 53.381,67.356 53.127,67.61 ; C20.2@60.239,49.74 60.239,50.978 U19.36@60.277,51.017 61.558,51.017 61.849,51.308 v1(61.849,54.737) ; C18.2@60.747,58.237 61.557,58.237 U19.24@61.777,58.017 ; C18.2@60.784,58.274 61.041,58.017 U19.24@61.777,58.017 ; U4.1@61.239,71.015 C45.1@63.287,71.003 C2.1@63.287,68.915 ; 61.57,61.742 62.291,61.021 ; 61.831,61.742 62.418,61.148 ; v1(61.849,56.769) 61.777,56.841 U19.24@61.777,58.017 ; 61.906,61.406 61.976,61.336 61.976,60.706 ; 61.995,61.742 62.43,61.308 62.43,61.16 ; 63.012,61.742 54.105,61.742 53.678,62.169 ; R7.1@63.16,46.919 64.74,45.339 v2(68.58,45.339) ; 67.38,54.559 67.38,55.302 v1(67.31,55.372) 67.643,55.016 ; 68.24,49.638 68.748,50.146 ; 68.748,49.13 69.129,48.749 ; U19.9@68.777,55.017 67.642,55.017 67.38,54.755 67.38,51.58 67.943,51.017 U19.1@68.777,51.017 69.346,50.448 C16.2@69.346,49.384 67.41,49.384 U19.48@67.277,49.517 ; U19.9@68.777,55.017 70.302,55.016 71.09,55.804 71.09,56.69 71.219,56.82 C33.2@72.068,56.82 ; R18.1@68.781,58.877 68.781,59.256 v1(69.342,59.817) ; 69.346,50.003 69.637,49.712 C16.2@69.637,49.638 ; C33.2@72.068,56.82 72.136,56.887 72.136,57.658 72.644,58.166 73.66,58.166 74.041,57.785 74.041,56.896 74.041,55.372 73.204,54.535 R25.2@73.204,54.356 ; C19.2@75.766,73.419 76.061,73.714 U1.48@77.061,73.714 83.312,67.464 ; v2(78.898,44.577) 78.898,45.878 80.663,47.643 R26.2@81.867,47.643 ; 78.898,45.25 79.456,44.692 79.456,44.577 ; C12.2@81.191,44.502 83.311,44.502 U12.1@83.462,44.653 ; 82.794,67.982 82.832,67.944 83.312,67.944 ; 83.048,67.728 83.096,67.728 83.312,67.944 ; C15.2@83.128,64.317 83.128,64.82 U1.64@82.365,65.583 83.312,66.529 83.312,67.464 ; U1.32@85.193,79.018 86.553,80.377 C22.2@86.553,80.531 ; U1.32@85.193,79.018 84.455,78.28 84.455,77.216 88.407,73.264 ; v1(86.233,48.641) 86.421,48.453 R38.2@86.421,47.643 ; 88.219,72.851 88.27,72.902 88.776,72.902 ; 88.382,73.015 88.407,73.264 ; 88.633,73.264 88.407,73.264 ; 88.727,72.949 88.735,73.365 ; C10.2@91.379,75.832 91.201,75.832 U1.19@89.789,74.421 83.312,67.944 ; L1.1@92.77,72.655 89.027,72.654 88.407,73.264 ; 102.661,54.528 102.706,54.573 102.706,55.155 ; v1(103.194,94.857) U5.10@105.191,94.857 ; R55.2@103.419,50.473 102.235,51.657 102.235,54.102 103.288,55.155 R56.2@103.419,55.155 ; 123.387,59.835 123.387,59.708 C38.1@124.149,58.946 ; R54.1@124.501,47.662 125.293,47.643 125.801,48.151 125.801,50.183 125.146,50.838 R53.1@124.501,50.837 ; R53.1@124.501,50.837 125.8,52.136 125.8,56.787 124.53,58.057 C38.1@124.53,58.092 ; U19.48@67.277,49.517 U19.48@67.351,49.443 ; U19.48@67.277,49.517 U19.48@67.351,49.443 ; U19.48@67.351,49.443 C17.2@67.351,47.897 U19.48@67.351,49.443 ; 83.312,67.464 83.312,67.944
  Top Layer w0.4: CARD1.4@44.852,86.439 44.951,86.538 46.198,86.538 47.223,86.538 C9.2@47.98,87.295 47.98,87.482 48.861,88.363 R19.1@48.86,88.565 ; v1(103.194,94.857) 103.194,95.649 103.802,96.257 U5.12@105.191,96.257 ; U5.10@105.191,94.857 109.477,94.856 v1(111.703,92.63) ; v1(111.703,92.63) 114.4,89.934 128.541,89.934 LED3.2@128.786,89.689
  Top Layer w0.5: 107.004,94.76 107.321,94.633 109.417,94.633 111.42,92.63 v1(111.703,92.63)
  Top Layer w0.6: R35.1@48.86,89.835 48.865,92.253 50.239,93.627 H2.16@50.239,95.91 ; R4.2@48.86,83.485 R36.2@48.86,86.025 49.242,86.406 50.206,86.406 50.841,87.041 50.841,87.93 50.206,88.565 R19.1@48.86,88.565 R35.1@48.86,89.835 ; H2.16@50.239,95.91 H2.15@50.239,98.45 H2.11@55.319,98.45 ; C4.1@84.693,81.211 85.372,80.531 ; 85.725,79.883 85.725,80.179 85.372,80.531 ; C22.2@86.553,80.531 85.372,80.531
  Top Layer w0.7: R4.2@48.86,83.485 49.611,83.485 v2(50.419,82.677) ; v2(51.562,43.434) 51.562,44.471 Q1.3@51.603,44.512 ; SW3.10@57.969,79.393 v2(59.436,79.375) ; 60.071,50.165 59.69,50.165 v2(59.309,49.784) ; 60.198,50.8 60.198,50.673 v2(59.309,49.784) ; C20.2@60.239,49.74 59.353,49.74 v2(59.309,49.784) ; C18.2@60.784,58.274 61.595,59.085 61.595,59.145 ; C18.2@60.784,58.274 61.595,58.293 61.595,60.325 64.897,63.627 64.897,68.199 64.008,69.088 ; v2(78.898,44.577) v2(79.883,44.577) 81.191,44.577 C12.2@81.191,44.502 ; C12.2@81.191,44.502 83.148,42.545 85.979,42.545 86.303,42.869 ; v2(81.534,87.757) 84.455,90.678 v1(90.297,90.678) ; v2(83.312,84.963) 83.312,82.592 C4.1@84.693,81.211 ; 86.303,43.326 86.47,43.492 87.16,43.492 ; v1(87.63,43.053) 86.487,43.053 86.303,42.869 ; 92.965,41.656 93.002,41.656 93.638,42.292 94.274,41.656 94.552,41.656 ; 93.101,73.035 94.104,72.033 94.104,71.957 ; R46.1@93.558,45.385 93.638,45.305 93.638,41.656 ; C7.2@97.135,44.341 97.63,44.836 U9.1@97.63,45.746 ; 97.282,43.561 97.282,42.545 96.393,41.656 88.997,41.656 R27.1@86.303,44.35 86.303,42.869 ; R48.1@99.258,45.366 98.776,45.364 98.384,45.758 U9.1@97.63,45.746 ; v2(100.33,54.864) 99.375,53.909 C25.1@98.426,53.909 97.216,53.909 96.647,53.34 24C02.8@96.648,51.837 96.648,51.053 100.584,47.117 100.584,45.974 99.949,45.339 99.285,45.339 R48.1@99.258,45.366 98.01,45.365 U9.1@97.63,45.746 ; v2(102.108,55.753) 102.706,55.155 R56.2@103.419,55.155 ; 102.997,84.455 102.997,82.723 106.259,79.462 ; D2.1@103.702,66.524 104.186,66.04 v2(104.775,66.04) ; v2(105.156,74.93) 105.103,74.983 U11.3@105.103,76.632 105.156,76.685 105.156,78.359 106.259,79.462 ; 105.587,80.133 105.754,79.966 105.754,78.957 ; C31.2@108.151,79.462 106.259,79.462 ; v2(119.044,62.103) v2(120.015,62.103) ; 120.51,61.608 120.518,62.606 ; U6.8@121.94,60.005 121.94,60.178 v2(120.015,62.103) ; R5.1@123.65,66.947 123.65,65.738 v2(120.015,62.103) ; L1.1@92.77,72.655 93.768,71.657 C35.2@93.803,71.657 94.361,72.214 v1(94.361,72.263) 94.361,72.517 v1(93.472,73.406) 92.77,72.704 L1.1@92.77,72.655
  Bottom Layer w0.3: v1(61.849,54.737) v1(61.849,56.769) ; v1(67.31,55.372) 67.31,57.785 v1(69.342,59.817) ; v1(86.233,48.641) 86.487,48.895 87.376,48.895 87.63,48.641 v1(87.63,43.053) ; C24.1@102.051,94.825 103.162,94.825 v1(103.194,94.857)
  Bottom Layer w0.5: 68.621,43.913 68.74,43.793 69.569,43.793 ; C13.2@75.541,82.469 75.541,84.584 CAN.3@75.606,84.649
  Bottom Layer w0.7: v2(50.419,82.677) 53.721,79.375 v2(59.436,79.375) 61.595,79.375 65.532,75.438 65.532,71.628 v1(63.881,69.977) ; v2(51.562,43.434) 51.689,43.561 57.277,43.561 ; 56.181,43.561 56.267,43.561 57.277,44.571 ; v2(59.309,49.784) 57.912,49.784 57.277,49.149 57.277,43.561 ; v1(68.326,48.641) 68.367,48.6 v1(68.367,47.86) 68.621,47.606 TP1.1@68.621,42.845 ; 69.552,43.777 68.58,44.749 v2(68.58,45.339) ; CAN.3@75.606,84.649 75.541,84.584 C13.2@75.541,82.469 75.541,81.939 76.454,81.026 78.105,81.026 83.226,86.147 R37.2@83.226,86.541 83.226,85.049 v2(83.312,84.963) 82.296,84.963 82.169,85.09 ; v2(79.883,44.577) v2(78.898,44.577) 70.353,44.577 ; v2(81.534,87.757) 81.534,86.995 81.989,86.54 ; 82.472,86.54 82.54,86.472 82.54,85.461 ; 82.54,86.093 82.436,86.093 81.989,86.54 ; R37.2@83.226,86.541 81.989,86.54 ; 485.8@88.687,90.127 88.914,89.9 C14.1@90.338,89.9 90.338,90.637 v1(90.297,90.678) ; v1(94.361,72.263) 98.933,72.263 104.48,66.716 104.592,66.716 104.775,66.421 v2(104.775,66.04) 105.156,66.421 v2(105.156,74.93) ; v2(100.33,54.864) 101.219,55.753 v2(102.108,55.753) 102.108,62.23 ; v2(101.854,83.312) v2(101.854,84.074) 98.425,87.503 98.425,92.71 100.54,94.825 C24.1@102.051,94.825 103.162,94.825 v1(103.194,94.857) ; 102.108,60.294 103.917,62.103 ; 102.108,61.202 102.172,61.267 103.081,61.267 ; 102.108,61.71 102.34,61.479 103.292,61.479 ; 102.108,62.774 102.693,62.188 102.693,62.103 ; 103.919,67.277 104.122,67.48 105.156,67.48 ; 104.658,67.48 105.156,67.996 ; 105.156,67.093 104.503,67.093 104.303,66.893 104.474,66.722 104.474,65.739 102.108,63.373 102.108,62.23 ; v1(111.703,92.63) R47.2@112.938,92.63 ; v2(120.015,62.103) v2(119.044,62.103) 103.917,62.103 ; 57.277,43.561 59.817,41.021 66.797,41.021 TP1.1@68.621,42.845 ; v2(68.58,45.339) 68.621,45.298 TP1.1@68.621,42.845 ; v2(68.58,45.339) 69.342,44.577 70.353,44.577 ; TP1.1@68.621,42.845 70.353,44.577 ; 102.108,62.23 102.235,62.103 103.917,62.103
  other v1: 64.404,67.93 64.404,68.791 64.404,69.652 64.404,70.513 64.404,71.374 46.217,86.538
  other v2: 51.562,43.434
485RE: 485.2 485.3 U1.27 | length 18.5
  Top Layer w0.3: v1(86.954,86.906) 88.605,86.906 91.907,83.604 91.907,82.194 U1.27@86.961,77.25
  Bottom Layer w0.3: 485.3@86.147,84.717 86.147,86.098 v1(86.954,86.906)
  Bottom Layer w0.5: 485.3@86.147,84.717 485.2@87.417,84.717
BLK: R50.1 U1.25 | length 47.3
  Top Layer w0.3: U1.25@87.668,76.543 93.495,82.37 93.495,88.494 103.083,98.082 112.608,98.082 117.18,93.51 v1(117.18,91.224)
  Bottom Layer w0.3: R50.1@116.104,91.115 117.071,91.115 v1(117.18,91.224)
BOOT0: R6.1 SW3.1 U1.60 | length 28.2
  Top Layer w0.3: SW3.1@65.869,79.393 66.149,79.393 v1(73.152,72.39) ; v1(77.724,63.246) 77.796,63.246 R6.1@78.393,63.843 78.393,64.439 U1.60@80.951,66.997
  Bottom Layer w0.3: v1(73.152,72.39) 73.152,64.643 74.168,63.627 74.549,63.246 v1(77.724,63.246)
C1_2: C1.2 U1.5 X5.1 | length 9.8
  Top Layer w0.3: U1.5@86.607,66.997 91.097,62.507 X5.1@91.097,60.978
  Top Layer w0.4: C1.2@89.609,59.957 90.076,59.957 X5.1@91.097,60.978
C5_2: C5.2 U1.6 X5.3 | length 7.7
  Top Layer w0.3: U1.6@86.961,67.351 90.54,63.771 X5.3@91.415,63.771
  Top Layer w0.4: X5.3@91.415,63.771 91.755,63.771 C5.2@92.776,64.792
C27_2: C27.2 R25.1 U19.7 | length 5.1
  Top Layer w0.3: U19.7@68.777,54.017 71.999,54.017 R25.1@72.338,54.356 72.338,55.407 C27.2@72.068,55.677
CANRX: CAN.4 SW3.6 | length 17.9
  Top Layer w0.3: SW3.6@57.952,84.578 59.352,85.979 v1(66.802,85.979)
  Bottom Layer w0.3: v1(66.802,85.979) 73.657,85.979 74.336,85.301 CAN.4@74.336,84.649
CANTX: CAN.1 SW3.9 | length 26
  Top Layer w0.3: SW3.9@57.969,80.663 58.613,80.663 59.713,81.763 59.713,84.557 60.5,85.344 v1(65.532,85.344)
  Bottom Layer w0.3: v1(65.532,85.344) 66.04,86.614 77.239,86.589 78.146,85.682 CAN.1@78.146,84.649
D2_2: D2.2 U3.1 | length 4.3
  Top Layer w0.5: D2.2@103.702,68.424 105.341,66.794 U3.1@105.928,66.793 ; 104.788,67.347 105.374,67.347 U3.1@105.928,66.793
D+: R14.2 R21.1 USB2.6 USB2.8 | length 8.9
  Top Layer w0.3: USB2.8@47.045,54.54 48.174,54.54 48.428,54.794 48.428,55.54 ; USB2.6@47.045,55.54 50.6,55.54 R14.2@50.849,55.291 R21.1@50.849,53.767 ; 48.179,55.54 48.047,55.545 48.428,55.149 ; 48.428,55.159 48.819,55.54
D-: R20.1 USB2.5 USB2.7 | length 7.2
  Top Layer w0.3: USB2.5@47.045,56.041 49.05,56.041 49.825,56.815 R20.1@50.849,56.815 ; USB2.7@47.046,55.039 46.139,55.039 45.888,55.291 45.888,55.799 46.129,56.04 USB2.5@47.046,56.04
ESP_RX: U1.16 U6.15 | length 34.4
  Top Layer w0.3: U1.16@90.496,70.886 91.533,69.85 v1(92.329,69.85) ; v1(97.155,64.516) 101.219,60.452 101.219,49.149 102.365,48.003 U6.15@106.233,48.005
  Bottom Layer w0.3: v1(92.329,69.85) 92.456,69.723 96.393,69.723 97.155,68.961 v1(97.155,64.516)
ESP_TX: U1.17 U6.16 | length 44.2
  Top Layer w0.3: U1.17@90.496,73.714 91.332,74.549 92.964,74.549 94.361,74.549 v1(97.79,71.12) ; v1(97.79,65.024) 101.346,61.468 107.442,61.468 108.712,60.198 108.712,46.99 107.727,46.005 U6.16@106.233,46.005
  Bottom Layer w0.3: v1(97.79,65.024) v1(97.79,71.12)
FCS: U1.33 U11.1 | length 23.2
  Top Layer w0.3: v1(82.042,80.137) 82.042,79.34 U1.33@82.365,79.018 ; v1(94.869,78.232) 100.962,78.232 U11.1@102.563,76.632
  Bottom Layer w0.3: v1(82.042,80.137) 84.963,80.137 86.868,78.232 v1(94.869,78.232)